# EAGLE board carret (EAGLE 5.11)
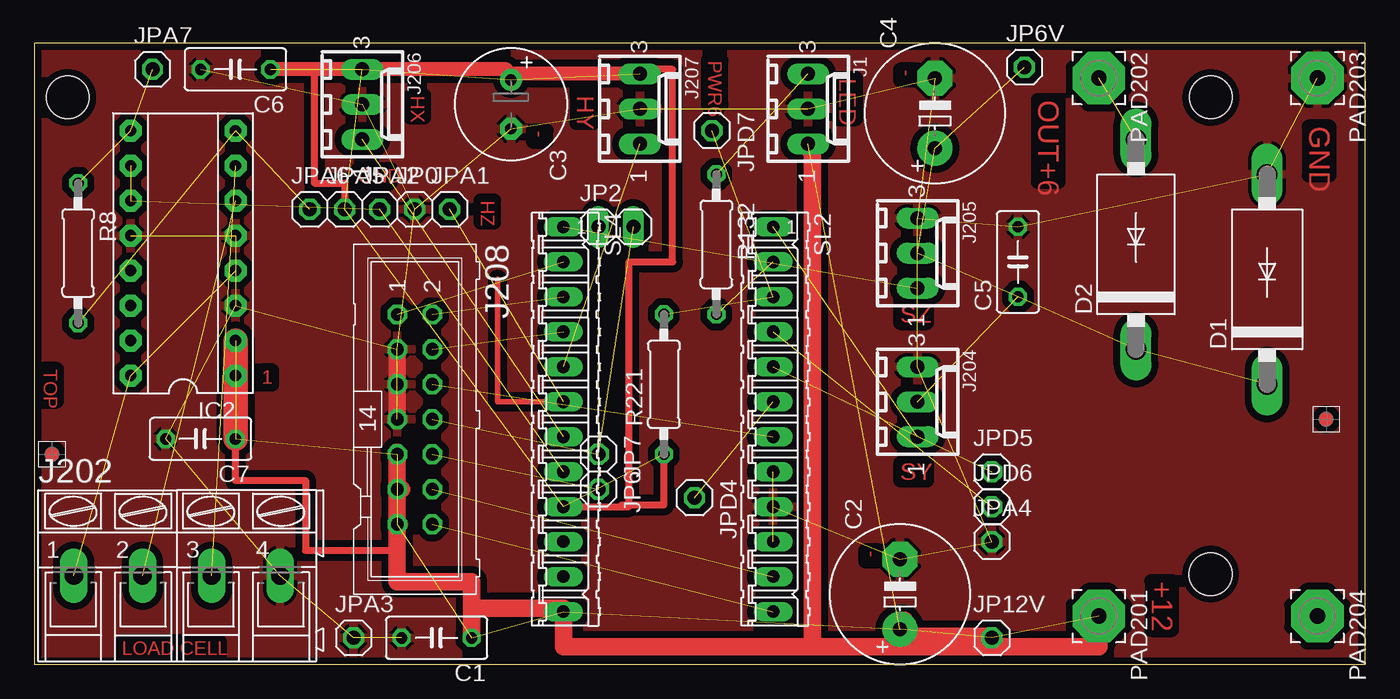
[diagram p0: board, top side]
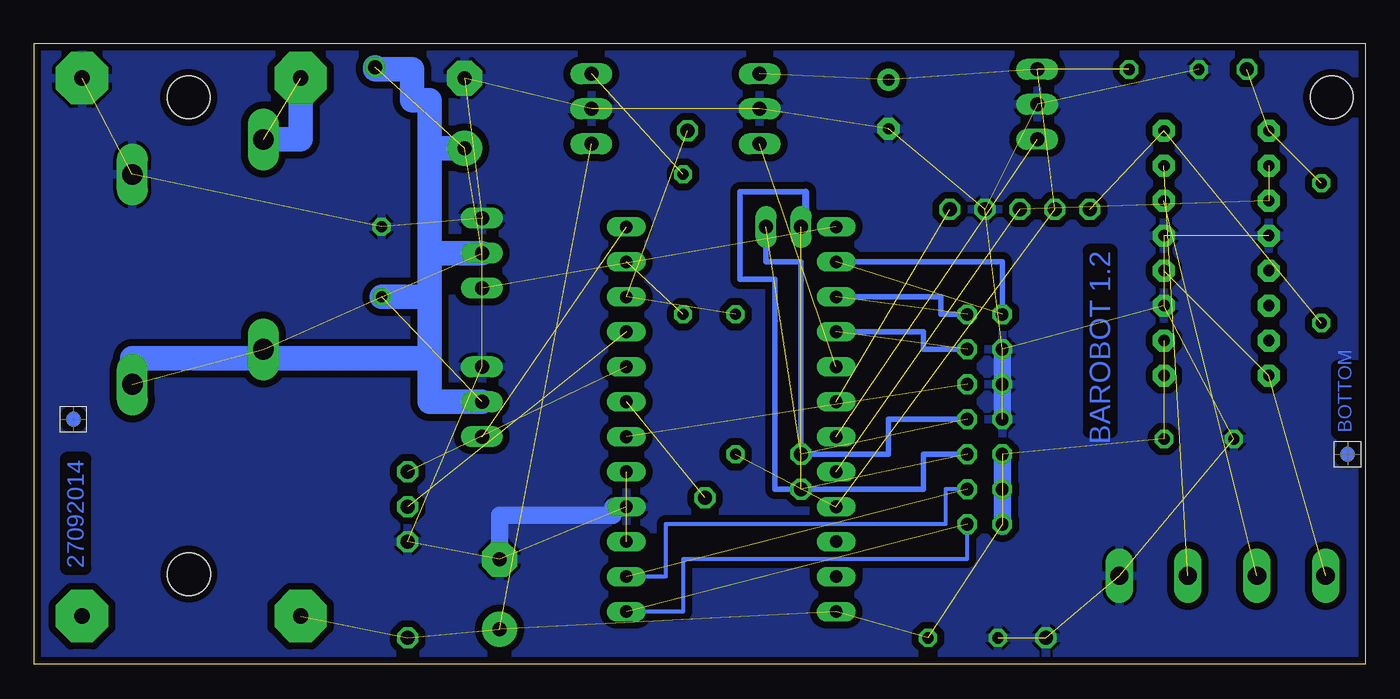
[diagram p1: board, bottom side, seen from below]

Size 96.65 x 45.09 mm. Coordinates in mm from the lower left corner, seen from the top.
Outline: 0,0 96.65,0 96.65,45.09 0,45.09 0,0
Copper layers (1*16): Top 0.035mm / dielectric 1.5mm / Bottom 0.035mm
Design rules "default *": minimum track width 10mil, minimum drill 0.5mm, track to track 10mil, track to pad 10mil, pad to pad 8mil, via to via 10mil, smd to smd 8mil, copper to edge 20mil, drill to drill 8mil, minimum pad ring 10mil, minimum via ring 8mil, stop-mask expansion 0mil, vias tented up to drill 0mil, thermal gap 10mil
Net classes: 0 default: width 0.381 mm, drill 0.254 mm, clearance 0.254 mm; 1 power12: width 1.778 mm; 2 ground: width 0.508 mm; 3 power5: width 0.508 mm; 4 power6: width 1.778 mm
Holes 3.1 mm at 85.42,6.54 85.44,41.15 2.41,41.15
bRestrict: area 122.7,23.5 to 124.3,26.4

## Footprints (pad centres in the part's own frame; a part is rotated, then mirrored left to right if it is on the bottom)
C050-030X075 = drill 0.813 octagon: 1 -2.54,0; 2 2.54,0
E5-10,5 = drill 1.016 pad 2.54 round: + -2.54,0 | drill 1.016 pad 2.54 octagon: - 2.54,0
E3,5-8 = drill 0.813 pad 1.6 round: + -1.778,0 | drill 0.813 pad 1.6 octagon: - 1.778,0
DO27-15 = drill 1.499 long: A 7.62,0; C -7.62,0
DO201-15 = drill 1.499 long: A 7.62,0; C -7.62,0
DIL16 = drill 0.813 pad 1.6 octagon: 1 -8.89,-3.81; 2 -6.35,-3.81; 3 -3.81,-3.81; 4 -1.27,-3.81; 5 1.27,-3.81; 6 3.81,-3.81; 7 6.35,-3.81; 8 8.89,-3.81; 9 8.89,3.81; 10 6.35,3.81; 11 3.81,3.81; 12 1.27,3.81; 13 -1.27,3.81; 14 -3.81,3.81; 15 -6.35,3.81; 16 -8.89,3.81
6410-03 = drill 1.016 long: 1 2.54,0; 2 0,0; 3 -2.54,0
AK300/4 = drill 1.321 long: 1 -7.493,0; 2 -2.515,0; 3 2.515,0; 4 7.493,0
ML14 = drill 0.914 octagon: 1 -7.62,-1.27; 2 -7.62,1.27; 3 -5.08,-1.27; 4 -5.08,1.27; 5 -2.54,-1.27; 6 -2.54,1.27; 7 0,-1.27; 8 0,1.27; 9 2.54,-1.27; 10 2.54,1.27; 11 5.08,-1.27; 12 5.08,1.27; 13 7.62,-1.27; 14 7.62,1.27
1X01 = drill 1.016 octagon: 1 0,0
1X02 = drill 1.016 long: 1 -1.27,0; 2 1.27,0
3,81/1,1 = drill 1.118 pad 3.81 octagon: 1 0,0
0207/10 = drill 0.813 octagon: 1 -5.08,0; 2 5.08,0
12P = drill 0.914 long: 1 -13.97,0; 2 -11.43,0; 3 -8.89,0; 4 -6.35,0; 5 -3.81,0; 6 -1.27,0; 7 1.27,0; 8 3.81,0; 9 6.35,0; 10 8.89,0; 11 11.43,0; 12 13.97,0

## Placement (x,y rotation side)
C1  100n  [C050-030X075]  29.21,1.91 180 top
C2  1000uF  [E5-10,5]  62.87,5.08 90 top
C3  100uF  [E3,5-8]  34.61,40.64 270 top
C4  1000uF  [E5-10,5]  65.41,40.01 90 top
C5  100n  [C050-030X075]  71.44,29.21 90 top
C6  100n  [C050-030X075]  14.61,43.18 180 top
C7  100n  [C050-030X075]  12.06,16.35 180 top
D1  1N5822  [DO27-15]  89.53,27.94 90 top
D2  1N5822  [DO201-15]  80.01,30.48 90 top
IC2  INA125P  [DIL16]  10.79,29.84 90 top
J1  WF03S-LF  [6410-03]  56.2,40.32 270 top
J202  [AK300/4]  10.37,6.42 0 top
J204  WF03S-LF  [6410-03]  64.13,19.05 270 top
J205  WF03S-LF  [6410-03]  64.13,29.84 270 top
J206  WF03S-LF  [6410-03]  23.81,40.64 270 top
J207  WF03S-LF  [6410-03]  43.97,40.32 270 top
J208  BH14S  [ML14]  27.62,17.78 270 top
JP0  [1X01]  27.62,33.02 0 top
JP2  [1X02]  42.23,31.75 0 top
JP6  [1X01]  40.96,12.7 270 top
JP6V  [1X01]  71.91,43.34 0 top
JP7  [1X01]  40.96,15.24 270 top
JP12V  [1X01]  69.53,1.91 0 top
JPA1  [1X01]  30.16,33.02 0 top
JPA2  [1X01]  25.08,33.02 0 top
JPA3  [1X01]  23.18,1.91 0 top
JPA4  [1X01]  69.53,8.89 0 top
JPA5  [1X01]  22.54,33.02 0 top
JPA6  [1X01]  20,33.02 0 top
JPA7  [1X01]  8.57,43.18 0 top
JPD4  [1X01]  47.94,12.06 270 top
JPD5  [1X01]  69.53,13.97 0 top
JPD6  [1X01]  69.53,11.43 0 top
JPD7  [1X01]  49.21,38.73 270 top
PAD201  [3,81/1,1]  77.31,3.49 270 top
PAD202  [3,81/1,1]  77.31,42.55 270 top
PAD203  [3,81/1,1]  93.19,42.55 270 top
PAD204  [3,81/1,1]  93.19,3.49 270 top
R8  1k  [0207/10]  3.17,29.84 270 top
R132  240  [0207/10]  49.53,30.48 270 top
R221  10k  [0207/10]  45.72,20.32 90 top
SL2  [12P]  53.66,17.78 270 top
SL4  [12P]  38.42,17.78 270 top
U$1  [FIDUCIAL_G10S]  1.27,15.24 0 top
U$2  [FIDUCIAL_G10S]  93.82,17.78 0 top
U$3  [FIDUCIAL_G10S]  93.82,17.78 0 bottom
U$4  [FIDUCIAL_G10S]  1.27,15.24 0 bottom

## Library data of the parts
C1 C5-C7 = resistor
C2-C4 R8 R132 R221 = rcl
D1 D2 = diode
IC2 = burr-brown; MF: TEXAS INSTRUMENT CONNECTORS; MPN: INA125P; OC_FARNELL: 1459461; OC_NEWARK: 35C1726
J1 J204-J207 = con-molex; OC_FARNELL: unknown; OC_NEWARK: unknown
J202 = con-ptr500; OC_FARNELL: unknown; OC_NEWARK: unknown
J208 = con-ml; OC_FARNELL: unknown; OC_NEWARK: unknown
JP0 JP2 JP6 JP6V JP7 JP12V JPA1-JPA7 JPD4-JPD7 = pinhead
PAD201-PAD204 = wirepad
SL2 SL4 = con-amp-quick; OC_FARNELL: unknown; OC_NEWARK: unknown
U$1-U$4 = dicons

## Nets
+12V [power12]: C1.1 C2.+ C7.1 IC2.1 IC2.2 J1.1 J208.9 J208.11 J208.13 JP12V.1 PAD201.1 SL4.12
GND [ground]: C1.2 C2.- C3.- C4.- C5.2 C6.2 C7.2 D1.A IC2.3 IC2.5 IC2.12 J1.2 J202.4 J204.3 J205.3 J206.2 J207.2 J208.3 J208.5 J208.7 JP0.1 JPA3.1 JPA4.1 PAD203.1 SL2.9
N$1: J1.3 R132.1
N$2: J208.14 SL2.12
N$3: R132.2 SL2.2
N$4: JPD7.1 R221.2 SL2.3
N$5: J206.1 SL4.7
N$6: J208.1 SL4.2
N$7: J208.12 SL2.11
N$8: J208.2 SL4.3
N$9: J208.10 JP2.1 JP6.1
N$10: J205.1 SL4.1
N$11: J208.8 JP2.2 JP7.1
N$12: J208.4 SL4.4
N$13: IC2.6 J202.2
N$14 [power12]: D2.A PAD202.1
N$15: SL2.8 SL2.10
N$16: J207.1 SL4.5
N$18: JPD6.1 SL2.4
N$19: JPD5.1 SL2.5
N$21: J204.1 SL2.1
N$22 [power6]: C4.+ C5.1 D1.C D2.C J204.2 J205.2 JP6V.1
N$24: JPD4.1 SL2.6
N$25: IC2.4 IC2.16 J202.1
N$26: IC2.7 J202.3
N$27: J208.6 SL2.7
N$28: JPA1.1 SL4.6
N$30: IC2.8 JPA6.1 R8.2
N$31: IC2.9 JPA7.1 R8.1
N$41: IC2.10 IC2.11 JPA2.1 SL4.8
VCC [power5]: C3.+ C6.1 J206.3 J207.3 JPA5.1 R221.1 SL4.9

## Tracks (layer width: path | path; a pad name or v marks a point on that pad's centre or on a via)
+12V  (11 unrouted)
  Top 0.508: 26.35,8.26 19.68,8.26 19.68,13.34 14.61,13.34 C7.1
  Top 1.27: 26.48,12.57 26.35,12.57 J208.11 26.67,12.7 | J208.13 26.48,10.16 | 56.52,1.27 38.42,1.27 SL4.12 38.42,4.06 31.75,4.06 | 56.52,1.27 62.8,1.27 | PAD201.1 77.31,1.27 62.8,1.27 | 26.35,15.37 J208.9 26.35,14.86 | 63.18,3.17 62.8,3.17 62.8,2.03 62.8,1.27 | JP12V.1 69.53,2.03 62.87,2.03 | 56.52,1.27 56.52,37.47 56.2,37.47 J1.1 | 31.75,4.06 31.75,5.97 26.35,5.97 26.35,8.26 26.35,14.86 | 26.35,14.86 | 31.75,4.06 C1.1
  Top 1.778: IC2.2 IC2.1 C7.1 | 62.8,2.03 62.87,2.03 C2.+
  Bottom 1.016: J208.11 | J208.9
  Bottom 1.27: 26.35,10.03 J208.13 26.35,10 | 77.18,3.11 77.18,3.49 PAD201.1 | 26.35,10 | J208.9 J208.11 26.35,10
GND  (24 unrouted)
  Top 1.27: J208.7 J208.3
  Bottom 1.27: J208.7 J208.5 J208.3 | 63.18,6.99 62.87,6.99 62.87,10.79 54.61,10.79 54.61,11.43 SL2.9
  pour Top (isolate 0.508, rank 3): 0,45.09 96.52,45.09 96.52,0 0,0
  pour Bottom (isolate 0.508): 0,45.09 96.52,45.09 96.65,0 0,0
N$1  (1 unrouted)
N$2  (1 unrouted)
  Bottom 0.305: J208.14 | J208.14 28.89,7.62 49.53,7.62 49.53,3.81 SL2.12
N$3  (1 unrouted)
N$4  (2 unrouted)
N$5  (1 unrouted)
N$6  (1 unrouted)
  Bottom 0.406: SL4.2 26.35,29.21 J208.1
N$7  (1 unrouted)
  Bottom 0.305: J208.12 30.48,12.7 30.48,10.16 50.8,10.16 50.8,6.35 SL2.11
N$8  (1 unrouted)
  Bottom 0.406: J208.2 30.8,25.4 30.8,26.67 SL4.3
N$9  (2 unrouted)
  Bottom 0.406: J208.10 32.07,15.24 32.07,12.7 JP6.1 42.86,12.7 42.86,27.94 45.4,27.94 45.4,34.29 40.64,34.29
  Bottom 0.508: JP2.1 40.64,31.75 40.64,34.29
N$10  (1 unrouted)
N$11  (2 unrouted)
  Bottom 0.406: J208.8 34.61,17.78 34.61,15.24 JP7.1 40.96,29.21 43.5,29.21 JP2.2
N$12  (1 unrouted)
  Bottom 0.406: J208.4 32.07,22.86 32.07,24.13 SL4.4
N$13  (1 unrouted)
N$14  (1 unrouted)
  Top 1.27: PAD202.1 76.83,42.55
  Bottom 1.778: D2.A 77.31,38.1 PAD202.1
  Bottom 2.54: 77.47,43.18 77.47,42.55 PAD202.1
N$15  (1 unrouted)
N$16  (1 unrouted)
N$18  (1 unrouted)
N$19  (1 unrouted)
N$21  (1 unrouted)
N$22  (6 unrouted)
  Bottom 1.778: J204.2 67.94,19.05 67.94,22.23 | 67.94,29.84 J205.2 | 67.94,22.23 67.94,26.67 | 67.94,26.67 67.94,29.84 | 67.94,29.84 67.94,37.47 | 67.94,37.47 67.94,40.96 69.22,40.96 69.22,43.18 71.91,43.18 JP6V.1 | 67.94,37.47 C4.+ | D1.C 89.53,22.23 80.01,22.23 | 67.94,22.23 80.01,22.23 | 80.01,22.23 D2.C | 67.94,26.67 C5.1
N$24  (1 unrouted)
N$25  (2 unrouted)
N$26  (1 unrouted)
N$27  (1 unrouted)
N$28  (1 unrouted)
  Top 0.406: SL4.6 33.66,19.05 33.66,27.94
N$30  (2 unrouted)
N$31  (2 unrouted)
N$41  (3 unrouted)
VCC  (6 unrouted)
  Top 0.508: 38.42,11.68 SL4.9 42.67,11.43 | 34.42,43.18 34.29,43.18 34.29,42.67 34.8,42.67 34.8,42.42 C3.+ | 42.67,11.43 43.18,11.43 43.18,29.21 46.35,29.21 46.35,43.18 43.97,43.18 | 43.97,43.18 43.81,43.18 | 43.97,43.18 J207.3 | JPA5.1 22.54,34.92 20.32,34.92 20.32,43.18 | R221.1 45.72,11.56 42.67,11.56 42.67,11.43
  Top 1.016: J207.3 34.61,42.86 C3.+ | 34.29,43.18 J206.3 20.32,43.18 C6.1
  Bottom 0.508: 43.94,42.86 J207.3 43.97,42.55 | C3.+ 34.61,42.67

## Text on the board
Top: PWR6 | LED | - | HX | HY | OUT+6 | - | GND | GND | HZ | SZ | TOP | 1 | SY | - | +12 | LOAD CELL
Bottom: BAROBOT 1.2 | BOTTOM | 27092014